# Altium PCB ir-kh.PcbDoc
Units mm, origin at the board's own origin, x right, y up, seen from the top; angles counter-clockwise.
Board outline 151 x 86.38 mm, 2 copper layers (Top Layer, Bottom Layer); 28 components, 21 nets, 72 pads, 0 vias.
Unrouted connection lines stored in the file: 12.
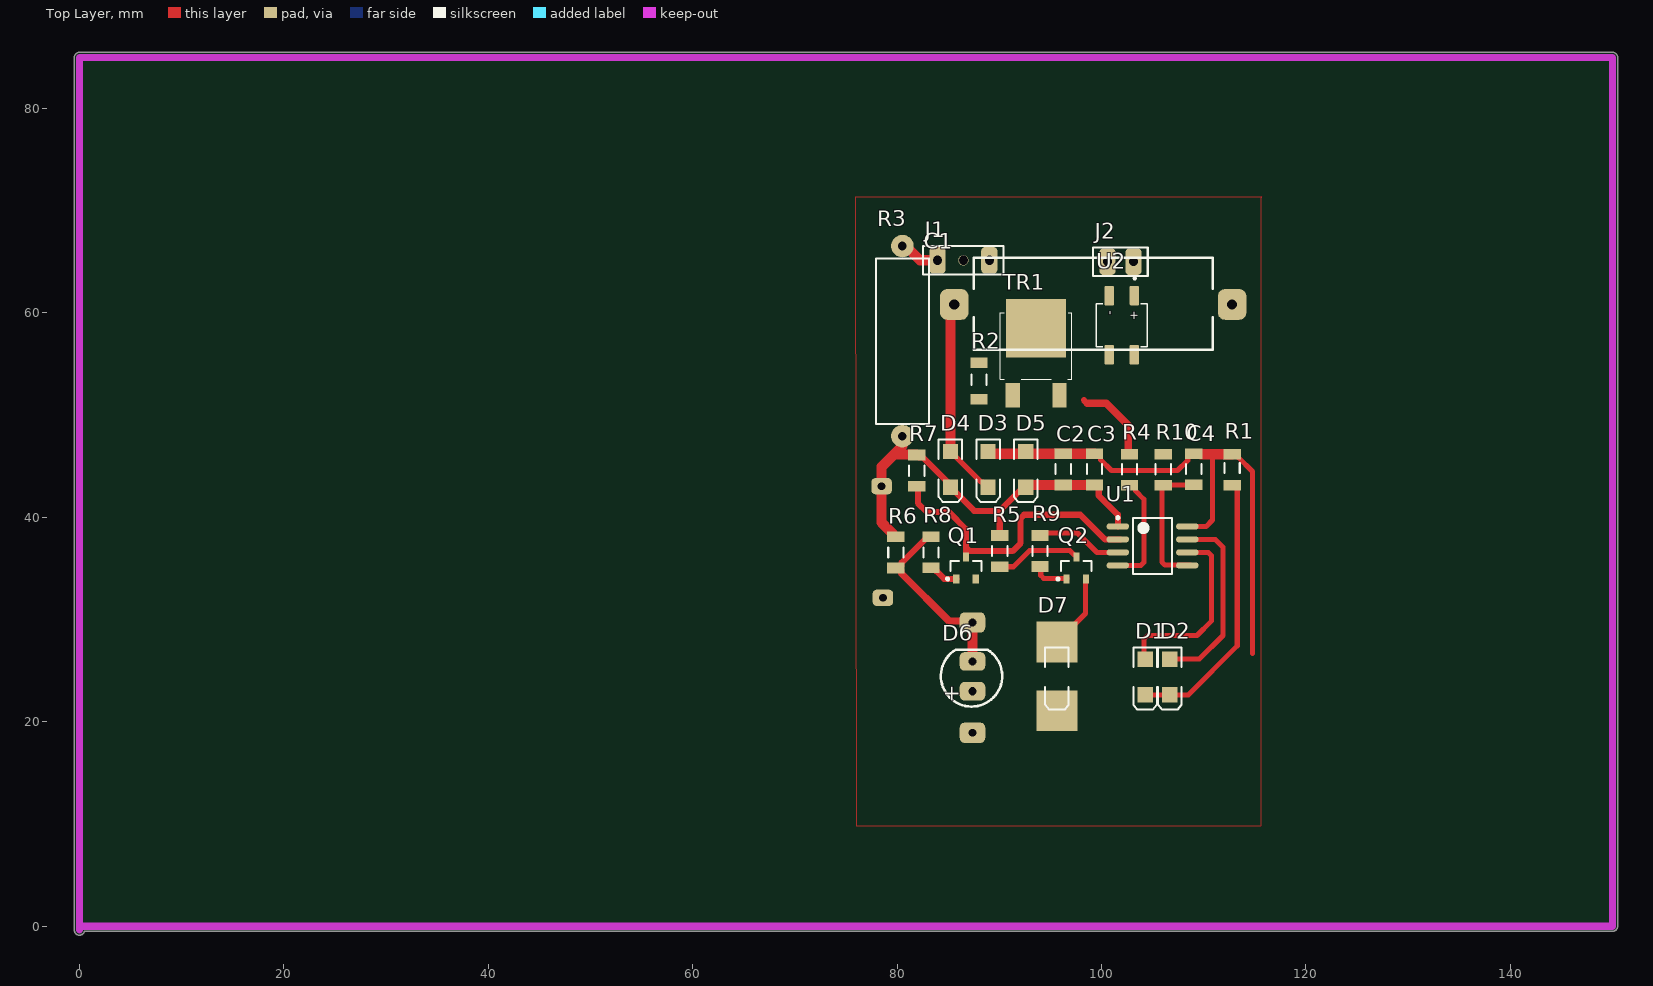
[diagram p0: Top Layer view]
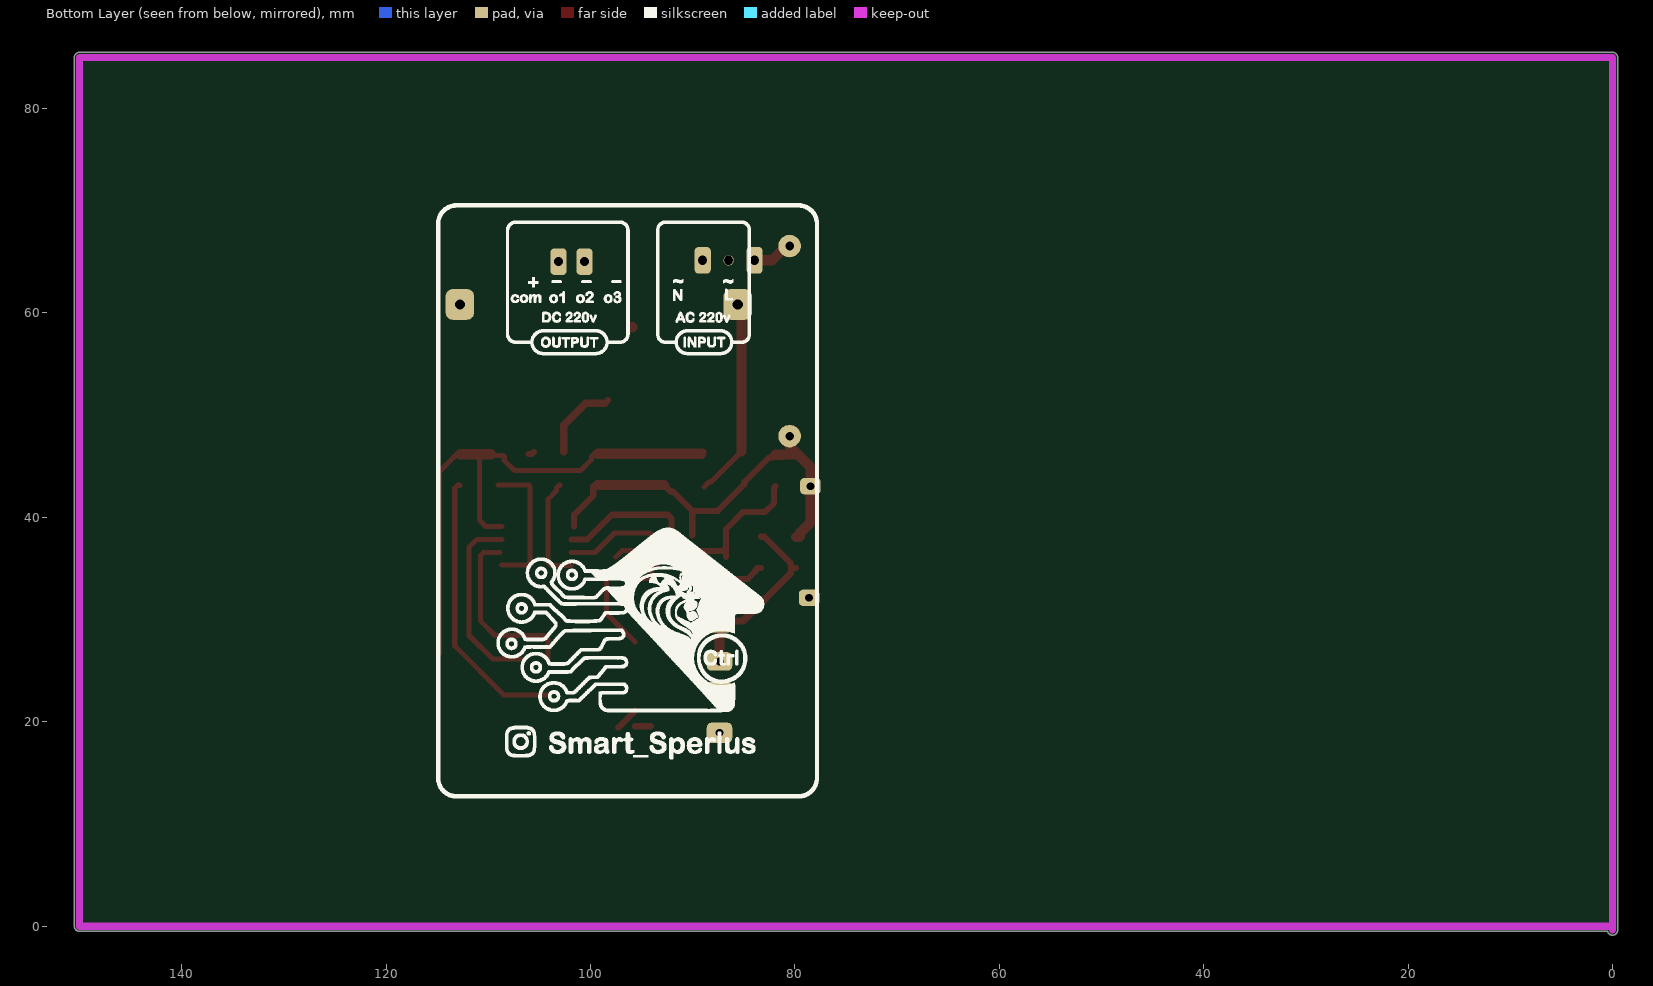
[diagram p1: Bottom Layer view, seen from below]
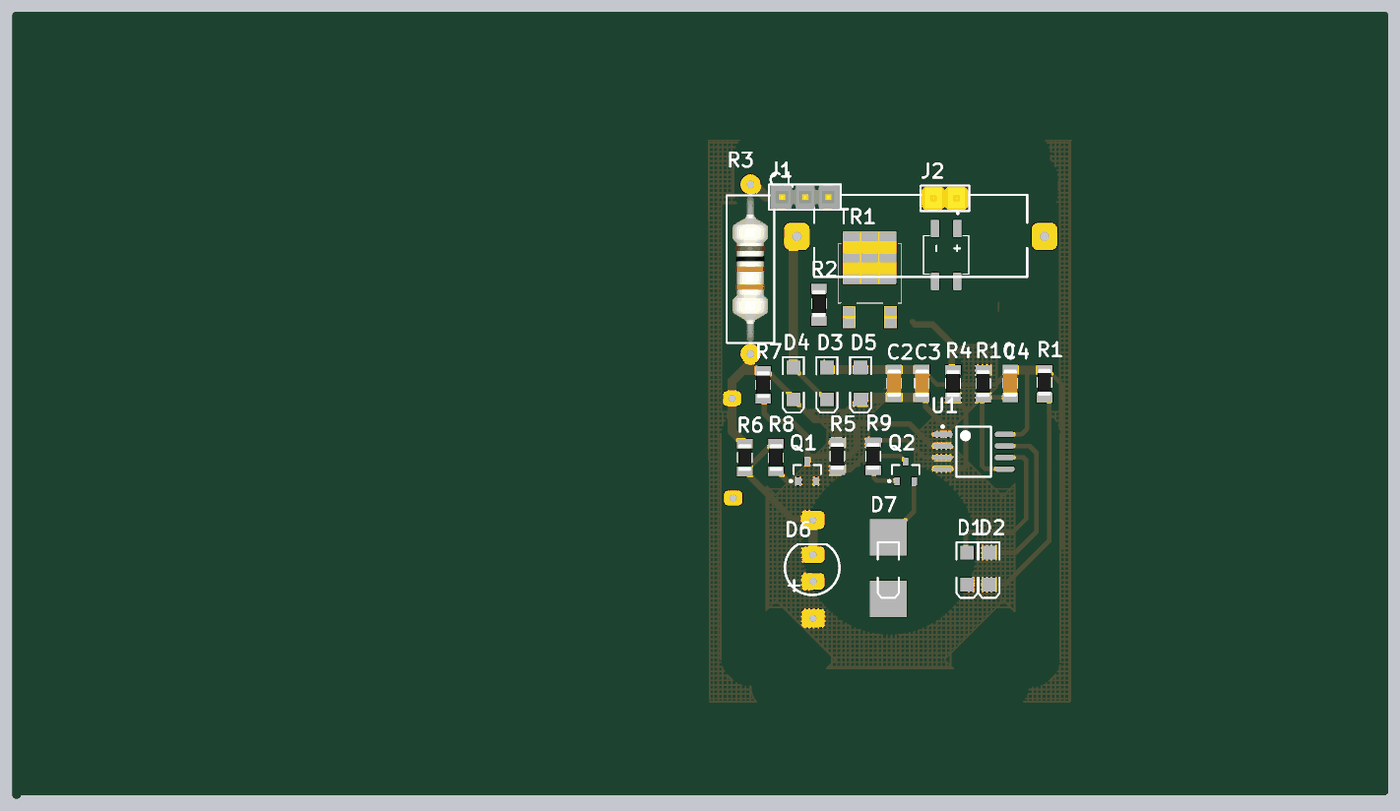
[diagram p2: 3D render of the assembled board from above, using the file's embedded part models]

## Layer stack, top to bottom
Top Solder: solder mask 0.0102, Solder Resist, Dk 3.5
Top Layer: signal copper 0.0356
Dielectric 1: dielectric 0.32, FR-4, Dk 4.8
Bottom Layer: signal copper 0.0356
Bottom Solder: solder mask 0.0102, Solder Resist, Dk 3.5

## Board outline
-0.5,-0.381 -0.5,85 cw(c0,85) 0,85.5 150,85.5 cw(c150,85) 150.5,85 150.5,0 cw(c150,0) 150,-0.5 0.486,-0.5 cw(c0,-0.381)

## Design rules (kind name [scope] priority, off if disabled: settings)
Clearance Clearance_1 [InPolygon] p1: gap=1 ignorepadtopadclearanceinfootprint=FALSE
Clearance [All] p2: gap=0.6 ignorepadtopadclearanceinfootprint=FALSE
PolygonConnect [All] p1: connectstyle=Relief reliefconductorwidth=0.254 reliefentries=4 polygonreliefangle="90 Angle" airgapwidth=0.254
RoomDefinition ir-kh [InComponentClass('ir-kh')] p1: confinementstyle=ConfineIn formatcopy=TRUE lockcomponents=FALSE outline 144.907,-4.953 247.904,-4.953 247.904,23.114 144.907,23.114
RoutingLayers [All] p1: top layer_v5=FALSE bottom layer_v5=TRUE
RoutingVias [All] p1: holewidth=0.711 width=2.5 viastyle="Through Hole" minholewidth=0.711 minwidth=1.27 maxholewidth=0.711 maxwidth=2
SolderMaskExpansion [All] p1: expansion=0.102 istentingtop=FALSE
Width [All] p1: maxlimit=3 minlimit=0.5 preferedwidth=1
29 further rules are at their usual default settings.

## Components (designator, comment, footprint, x,y, rotation, side; value= is the part's Value field where it differs from the comment)
C1 "1uf 400v" "1uf 400v" 111.506,65.405 r180 top value=1uF
C2 "=Value" "CAP 1206"#1 96.266,44.704 r90 top
C3 "=Value" "CAP 1206"#1 99.314,44.704 r90 top
C4 "=Value" "CAP 1206"#2 109.034,44.772 r270 top
D1 "LED2" 3.2X1.6X1.1#1 104.267,24.384 r270 top
D2 "LED2" 3.2X1.6X1.1#1 106.68,24.384 r270 top
D3 "D Tunnel1" 3.2X1.6X1.1#1 88.9,44.704 r270 top
D4 "D Tunnel1" 3.2X1.6X1.1#1 85.217,44.704 r270 top
D5 "D Tunnel1" 3.2X1.6X1.1#1 92.583,44.704 r270 top
D6 "MODEL" LED-5mm 87.376,24.384 r180 top
D7 "LED2" 3.2X1.6X1.1#2 95.631,24.384 r270 top
J1 "Header3X1" "HEADER 3X1" 83.947,65.151 r0 top
J2 "Header2X1" "Header 2X1" 101.854,65.024 r0 top
Q1 "QNPN" SOT-23B_L 86.741,35.052 r90 top
Q2 "QNPN" SOT-23B_L 97.536,35.052 r90 top
R1 "10K" "RES 1206 (3216X08L)"#1 112.776,44.831 r90 top
R2 "10K" "RES 1206 (3216X08L)"#2 88.011,53.467 r270 top
R3 "10K" Res-(2/1) 80.518,66.548 r270 top
R4 "10K" "RES 1206 (3216X08L)"#3 102.743,44.704 r270 top
R5 "10K" "RES 1206 (3216X08L)"#4 90.043,36.703 r90 top
R6 "10K" "RES 1206 (3216X08L)"#5 79.883,36.576 r270 top
R7 "10K" "RES 1206 (3216X08L)"#5 81.915,44.577 r270 top
R8 "10K" "RES 1206 (3216X08L)"#4 83.312,36.576 r270 top
R9 "10K" "RES 1206 (3216X08L)"#4 93.98,36.703 r270 top
R10 "10K" "RES 1206 (3216X08L)"#3 106.045,44.704 r270 top
TR1 "BT136S-600D" SOT428 93.599,56.769 r0 top
U1 "ATtiny15L-1SC" 8S2_N 105,37.211 r0 top
U2 "MB6S" SOIC245P670X270-4N 101.981,58.801 r270 top

## Footprints (in the part's own frame and the unit in brackets; to place one, negate y for a bottom-side part, rotate by r counter-clockwise, add the part's x,y. Pads: shape width x height; smd on the part's side, far side on the other; paste and mask are expansions set on the pad)
"1uf 400v" [mm] "24*9mm"
  rrect50% 2.8x3 hole 1: 1(-1.27,4.572) 2(25.908,4.572)
  silkscreen extent 0.63,0 24,9
3.2X1.6X1.1#1 [mm] "SMT LED; 2 Flat Leads"
  rect 1.5x1.5 smd: 1(-1.75,0) 2(1.75,0)
  silkscreen extent -2.9,-1.15 3.2,1.15
3.2X1.6X1.1#2 [mm] "SMT LED; 2 Flat Leads"
  rect 4x4 smd: 1(-3.429,0) 2(3.302,0)
  silkscreen extent -2.9,-1.15 3.2,1.15
8S2_N [mm] "SOP, 8-Leads, Body 5.3x5.3mm, Pitch 1.27mm, IPC Medium Density"
  oval 2.2x0.6 smd: 1(-3.4,1.905) 2(-3.4,0.635) 3(-3.4,-0.635) 4(-3.4,-1.905) 5(3.4,-1.905) 6(3.4,-0.635) 7(3.4,0.635) 8(3.4,1.905)
  silkscreen extent -3.52,-2.75 1.9,2.88, body extent -2.73,-2.75 2.73,2.75, height 2.16
"CAP 1206"#1 [mm]
  rect 1.05x1.7 smd: 1(-1.533,0) 2(1.517,0)
  silkscreen extent -0.47,-0.75 0.53,0.75, body extent -1.49,-0.77 1.55,0.75, height 0.75
"CAP 1206"#2 [mm]
  rect 1.05x1.7 smd: 1(-1.461,0) 2(1.589,0)
  silkscreen extent -0.47,-0.75 0.53,0.75, body extent -1.49,-0.77 1.55,0.75, height 0.75
"Header 2X1" [mm]
  rrect50% 1.6x2.6 hole 0.9: 1(-1.27,0) 2(1.27,0)
  silkscreen extent -2.67,-1.4 2.67,1.4, body extent -2.54,-1.27 2.54,1.27, height 9.5
"HEADER 3X1" [mm]
  rrect50% 1.6x2.6 hole 0.9: 1(0,0) 3(5.08,0)
  round 1 hole 0.9: 2(2.54,0)
  silkscreen extent -1.4,-1.4 6.48,1.4, body extent -1.24,-1.27 6.38,1.27, height 8.38
LED-5mm [mm] "LED; 2 Leads"
  rrect50% 2.5x1.8 hole 0.8: 1(0,1.397) 2(0,-1.524)
  silkscreen extent -2.91,-2.67 3.09,2.9
"RES 1206 (3216X08L)"#1 [mm] "Chip Resistor, 2-Leads, Body 3.2x1.6mm, IPC High Density _ (0.125 W)"
  rect 1.05x1.7 smd: 1(-1.691,0) 2(1.359,0)
  silkscreen extent -0.5,-0.75 0.5,0.75, body extent -1.52,-0.76 1.53,0.76, height 0.6
"RES 1206 (3216X08L)"#2 [mm] "Chip Resistor, 2-Leads, Body 3.2x1.6mm, IPC High Density _ (0.125 W)"
  rect 1.05x1.7 smd: 1(-1.651,0) 2(1.905,0)
  silkscreen extent -0.5,-0.75 0.5,0.75, body extent -1.52,-0.76 1.53,0.76, height 0.6
"RES 1206 (3216X08L)"#3 [mm] "Chip Resistor, 2-Leads, Body 3.2x1.6mm, IPC High Density _ (0.125 W)"
  rect 1.05x1.7 smd: 1(-1.486,0) 2(1.564,0)
  silkscreen extent -0.5,-0.75 0.5,0.75, body extent -1.52,-0.76 1.53,0.76, height 0.6
"RES 1206 (3216X08L)"#4 [mm] "Chip Resistor, 2-Leads, Body 3.2x1.6mm, IPC High Density _ (0.125 W)"
  rect 1.05x1.7 smd: 1(-1.533,0) 2(1.517,0)
  silkscreen extent -0.5,-0.75 0.5,0.75, body extent -1.52,-0.76 1.53,0.76, height 0.6
"RES 1206 (3216X08L)"#5 [mm] "Chip Resistor, 2-Leads, Body 3.2x1.6mm, IPC High Density _ (0.125 W)"
  rect 1.05x1.7 smd: 1(-1.517,0) 2(1.533,0)
  silkscreen extent -0.5,-0.75 0.5,0.75, body extent -1.52,-0.76 1.53,0.76, height 0.6
Res-(2/1) [mm]
  round 2.2 hole 0.85: 1(0,0) 2(18.6,0)
  silkscreen extent 1.2,-2.6 17.4,2.6, body extent 1.28,-1.98 17.32,1.92, height 7.03
SOIC245P670X270-4N [mm]
  rrect23% 1.91x0.91 smd: 1(-2.9,1.225) 2(-2.9,-1.225) 3(2.9,-1.225) 4(2.9,1.225)
  silkscreen extent -4.68,-2.48 2.1,2.48
SOT428 [mm]
  rect 1.4x2.4 smd paste-2: 1(-2.285,-4.8) 3(2.285,-4.8)
  rect 5.9x5.75 smd paste-4: MB(0,1.725)
  silkscreen extent -3.5,-3.25 3.5,3.25
SOT-23B_L [mm] "SOT23, 3-Leads, Body 2.9x1.3mm, Pitch 0.95mm, Lead Span 2.4mm, IPC High Density"
  rect 0.85x0.6 smd: 1(-1.075,0.95) 2(-1.075,-0.95) 3(1.075,0)
  silkscreen extent -1.2,-1.5 0.7,1.92, body extent -0.7,-1.5 0.7,1.5, height 1.14

## Part data
C1: "Capacitor 24*9mm", ComponentLinkURL=www.picpars.com, Designer="Seyed Mohsen Ghasemain"
C2 C3 C4: library part Capacitor, "Capacitor"
D1 D2 D7: "Typical RED, GREEN, YELLOW, AMBER GaAs LED", LatestRevisionDate=17-Jul-2002, LatestRevisionNote="Re-released for DXP Platform.", PackageDescription="SM LED; 2 Flat Leads", PackageReference=3.2X1.6X1.1, PackageVersion=Feb-2002, Published=8-Jun-2000, Publisher="Altium Limited"
D3 D4 D5: "Tunnel Diode - RLC Model", LatestRevisionDate=17-Jul-2002, LatestRevisionNote="Re-released for DXP Platform.", PackageDescription="SM LED; 2 Flat Leads", PackageReference=3.2X1.6X1.1, PackageVersion=Feb-2002, Published=8-Jun-2000, Publisher="Altium Limited"
D6: library part "LED 5mm", "Typical LED", COLOR=RED
Q1 Q2: "NPN Bipolar Transistor", LatestRevisionDate=29-May-2009, LatestRevisionNote="IPC-7351 Footprint Added.", PackageDescription="3-Pin SOT-23 Package 0.95 mm Pitch, 2.4 mm Lead Span", PackageReference=SOT-23B, PackageVersion=Aug-1999, Published=8-Jun-2000, Publisher="Altium Limited"
R1 R2 R3 R4 R5 R6 R7 R8 R9 R10: library part Resistor, "Resistor", Power="1/4 W", Tolerance=5%
TR1: "TRIAC 600V 27A 3-Pin(2+Tab) DPAK", Package=None, Check_prices=https://www.snapeda.com/parts/BT136S-600D/BitFenix+Co.+Ltd./view-part/?ref=eda, MF="WeEn Semiconductor(Hong Kong)Co.,Limited", MP=BT136S-600D, SnapEDA_Link=https://www.snapeda.com/parts/BT136S-600D/BitFenix+Co.+Ltd./view-part/?ref=snap
U1: "8-Bit AVR Microcontroller with 1K Byte of Flash Memory", Supplier Part Number 1=ATTINY15L-1SC-ND, ComponentLink1Description=Datasheet, ComponentLink1URL=http://www.atmel.com/dyn/resources/prod_documents/doc1187.pdf, ComponentLink2Description="Atmel.com Home", ComponentLink2URL=http://www.atmel.com, DatasheetVersion=1187E-AVR-06/02, LatestRevisionDate=16-Oct-2006, LatestRevisionNote="IPC-7351 Footprint Added.", PackageDescription="8-Lead, 0.208\" Body, Plastic Small Outline Package (EIAJ)", PackageReference=8S2, PackageVersion="revF, Apr-2008", Published=17-Sep-2003, Publisher="Altium Limited", Supplier 1=Digi-Key, Supplier 2=Mouser, Supplier Part Number 2=556-ATTINY15L1SC
U2: "Bridge Rectifier Single Phase Standard 600V Surface Mount 4-SOIC", Package="BESOP-4 Surge Components", Digi-Key_Part_Number=MB6SCT-ND, Digi-Key_Purchase_URL=https://www.digikey.com.tr/product-detail/en/on-semiconductor/MB6S/MB6SCT-ND/965654?utm_source=snapeda&utm_medium=aggregator&utm_campaign=symbol, MF="ON Semiconductor", MP=MB6S, SnapEDA_Link=https://www.snapeda.com/parts/MB6S/ON%20Semiconductor/view-part/2774209/?ref=snap

## Free pads (board coordinates)
  rrect50% 2.5x2 hole 0.762: 2(87.376,29.716) 3(87.376,18.923)
  rrect50% 2x1.6 hole 0.762: 4(78.486,43.053) 5(78.613,32.131)

## Nets (pads, with @x,y where several pads share a name; then routed paths per layer and width w, separated by ;. In a path a pad name is that pad's centre, name@x,y a point inside that pad or via, vN(x,y) a via of type N, cw(c..) or ccw(c..) an arc to the next point about the centre after c; other vN are vias at no path point)
GND: C2.2 C3.2 C4.1 D3.1 D5.1 D6.1 D7.2 pad.3 pad.5 Q1.2 R1.2 U1.8 | length 58.7
  Top Layer w0.5: D3.1 D3.1@89.133,46.221 ; C3.2 99.639,46.221 99.914,45.946 99.914,45.628 100.965,44.577 107.433,44.577 108.434,45.578 108.434,45.958 108.514,46.038 109.601,46.038 C4.1@109.741,46.177 ; U1.8@108.683,39.116 110.236,39.116 110.871,39.751 110.871,46.177 ; R1.2@113.063,46.228 113.376,45.915 113.376,45.882 114.765,44.493 114.765,26.67
  Top Layer w0.6: D7.2@94.107,19.558 D7.2@95.631,19.558 ; D7.2 D7.2@97.282,19.431
  Top Layer w1: D3.1@89.133,46.221 C2.2 C3.2 ; C4.1@109.741,46.177 110.871,46.177 112.763,46.177 R1.2
ir-r: Q1.3 R7.2 U1.2 | length 29.3
  Top Layer w0.6: R7.2 82.042,42.917 82.042,41.402 82.931,40.513 85.09,40.513 86.741,38.862 86.741,37.054 ; Q1.3 86.741,37.054 ; U1.2@101.864,37.846 100.33,37.846 97.917,40.259 92.426,40.259 92.075,39.908 92.075,37.484 91.294,36.703 87.092,36.703 86.741,37.054
ir-t: R9.1 U1.3 | length 8.8
  Top Layer w0.5: R9.1 94.225,38.481 97.663,38.481 99.568,36.576 U1.3 U1.3@101.883,36.576
l1: D2.1 U1.7 | length 18.2
  Top Layer w0.5: D2.1@106.807,26.134 109.573,26.134 111.887,28.448 111.887,37.084 111.125,37.846 U1.7@108.683,37.846
l2: D1.1 U1.6 | length 17.7
  Top Layer w0.5: D1.1@104.14,26.134 104.14,28.067 104.521,28.448 109.347,28.448 110.744,29.845 110.744,36.283 110.451,36.576 U1.6@108.859,36.576
NetC1_2: C1.2 D3.2 D4.1 R2.2 | length 19.5
  Top Layer w0.5: D4.1 88.217,43.454 88.4,43.454 D3.2
  Top Layer w1: D4.1 C1.2@85.217,60.833
NetD1_2: D1.2 D2.2 R1.1 | length 27.2
  Top Layer w0.5: D1.2@104.14,22.634 106.807,22.634 108.486,22.634 113.284,27.432 113.284,42.865 113.009,43.14 R1.1
NetD6_2: D6.2 pad.2 R6.2 R8.1 | length 17.8
  Top Layer w0.6: R6.2@80.303,34.949 80.433,34.818 R6.2@80.433,34.522 ; R8.1 82.987,38.109 82.762,37.884 80.433,35.555 80.433,35.268 R6.2@80.208,35.043 ; pad.2@87.247,29.845 pad.2 ; R6.2@80.208,35.043 R6.2 R6.2@80.208,35.043
  Top Layer w0.7: R6.2@80.433,34.522 85.11,29.845 pad.2@87.247,29.845
  Top Layer w1: D6.2 pad.2@87.376,29.125
NetD7_1: D7.1 Q2.2 | length 7.3
  Top Layer w0.5: D7.1 98.425,30.607 98.425,33.545 98.436,33.556 98.436,33.927 Q2.2
NetJ1_1: J1.1 R3.1 | length 4
  Top Layer w1: R3.1 80.843,66.548 82.24,65.151 J1.1
NetJ2_1: J2.1 U2.2
NetJ2_2: J2.2 U2.1
NetQ1_2: Q1.1 R8.2 | length 3
  Top Layer w0.6: R8.2 83.637,35.059 83.862,34.834 83.862,34.706 84.591,33.977 Q1.1
NetQ2_1: Q2.3 R5.1 | length 8.7
  Top Layer w0.5: R5.1@89.789,35.17 R5.1 91.387,35.17 92.979,36.762 96.901,36.762 Q2.3
NetQ2_2: Q2.1 R9.2 | length 4.5
  Top Layer w0.5: R9.2@93.472,35.186 R9.2@94.284,35.186 ; R9.2@93.776,35.186 94.051,34.911 94.051,34.329 94.343,34.036 Q2.1@96.636,34.036
NetR4_1: R4.1 TR1.3 | length 8
  Top Layer w0.6: 98.269,51.47 98.569,51.17
  Top Layer w0.7: 98.569,51.17 100.468,51.17 102.616,49.022 R4.1@102.616,46.415
NetTR1_MB: TR1.MB U2.3 | length 0.1
  Top Layer w1: TR1.MB@95.884,58.595 TR1.MB@95.959,58.595
nol: C1.1 J1.3 R2.1 R10.1 U2.4 | length 0.6
  Top Layer w0.6: R10.1@105.537,46.415 105.762,46.19 R10.1
out: R4.2 U1.4 | length 10.4
  Top Layer w0.5: U1.4@101.901,35.287 103.847,35.287 104.14,35.58 104.14,41.783 103.343,42.58 103.343,42.865 103.068,43.14 R4.2@102.997,43.14
vcc: C2.1 C3.1 D4.2 D5.2 pad.4 R3.2 R5.2 R6.1 R7.1 TR1.1 U1.1 | length 42.1
  Top Layer w0.5: D5.2 D5.2@92.8,43.171 ; C3.1 99.568,43.171 C3.1@99.695,43.044
  Top Layer w0.6: R7.1 82.14,45.869 82.528,45.869 84.949,43.448 84.949,43.222 87.531,40.64 90.043,40.64 ; R5.2 90.043,40.64 ; D5.2 92.133,42.504 91.907,42.504 90.043,40.64 ; C3.1@99.695,43.044 99.725,43.014 99.725,42.134 101.6,40.259 U1.1
  Top Layer w1: R6.1 79.558,38.093 79.533,38.118 79.533,38.443 78.486,39.49 78.486,44.958 79.67,46.142 ; R3.2 80.518,46.99 79.67,46.142 ; R7.1 81.89,46.119 81.222,46.119 81.199,46.142 79.67,46.142 ; D5.2@92.8,43.171 C2.1 C3.1
zero: C4.2 R10.2 U1.5 | length 13.3
  Top Layer w0.5: R10.2 105.918,43.013 105.918,35.618 106.211,35.325 U1.5@108.683,35.325 ; R10.2@106.215,43.183 C4.2
pads on no net: J1.2

## Polygon pours and split planes (outlines as drawn)
GND on Top Layer "NONET_L01_P024" (hatched 90Degree grid 0.5 track 0.2, shelved, pour order 24): 75.946,71.374 115.697,71.374 115.57,71.247 115.57,9.779 76.073,9.779

## Keep-outs
Keep-Out Layer:
  lines w0.7: 0,-0.381 0,85 150,85 150,0 0,0

## Silkscreen, mask and mechanical layers (free items; w line width, h text height)
Bottom Overlay:
  drawing of 14186 lines, arcs and shapes, not listed
Bottom Solder:
  lines w0.2: 76.454,11.557 76.454,71.374 116.332,71.374 116.332,11.557 76.454,11.557

## Text inside footprints (layer, text, board x,y; h text height)
D6: Top Overlay "+" at 84.709,23.622 h1.52 r270
U2: Top Overlay "-" at 100.581,60.201 h0.81 r270; Top Overlay "+" at 102.871,60.2 h0.81 r270